# Altium PCB Prac FabLab.PcbDoc
Units mil, origin at the board's own origin, x right, y up, seen from the top; angles counter-clockwise.
Board outline 3565 x 2985 mil, 2 copper layers (Top Layer, Bottom Layer); 37 components, 41 nets, 155 pads, 10 vias.
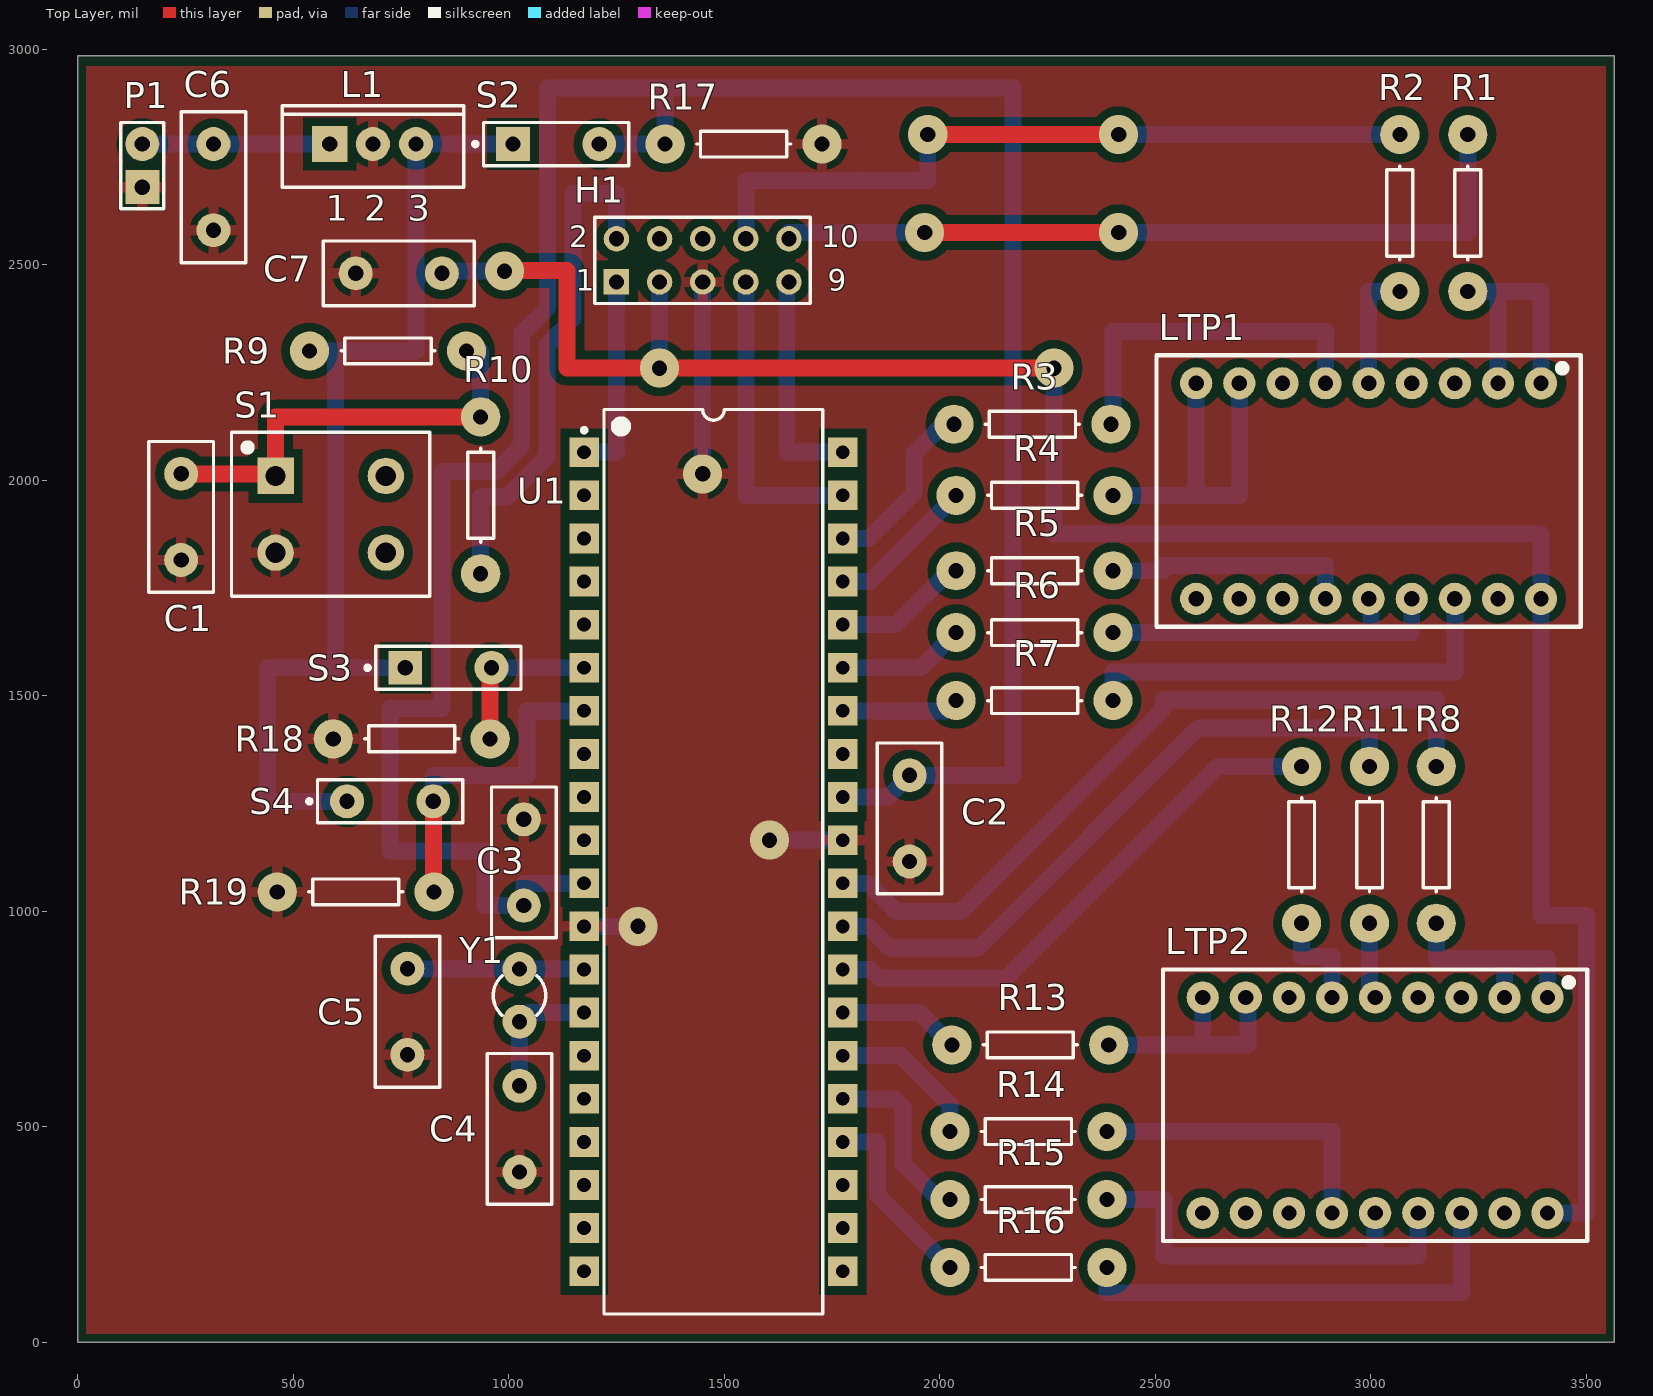
[diagram p0: Top Layer view]
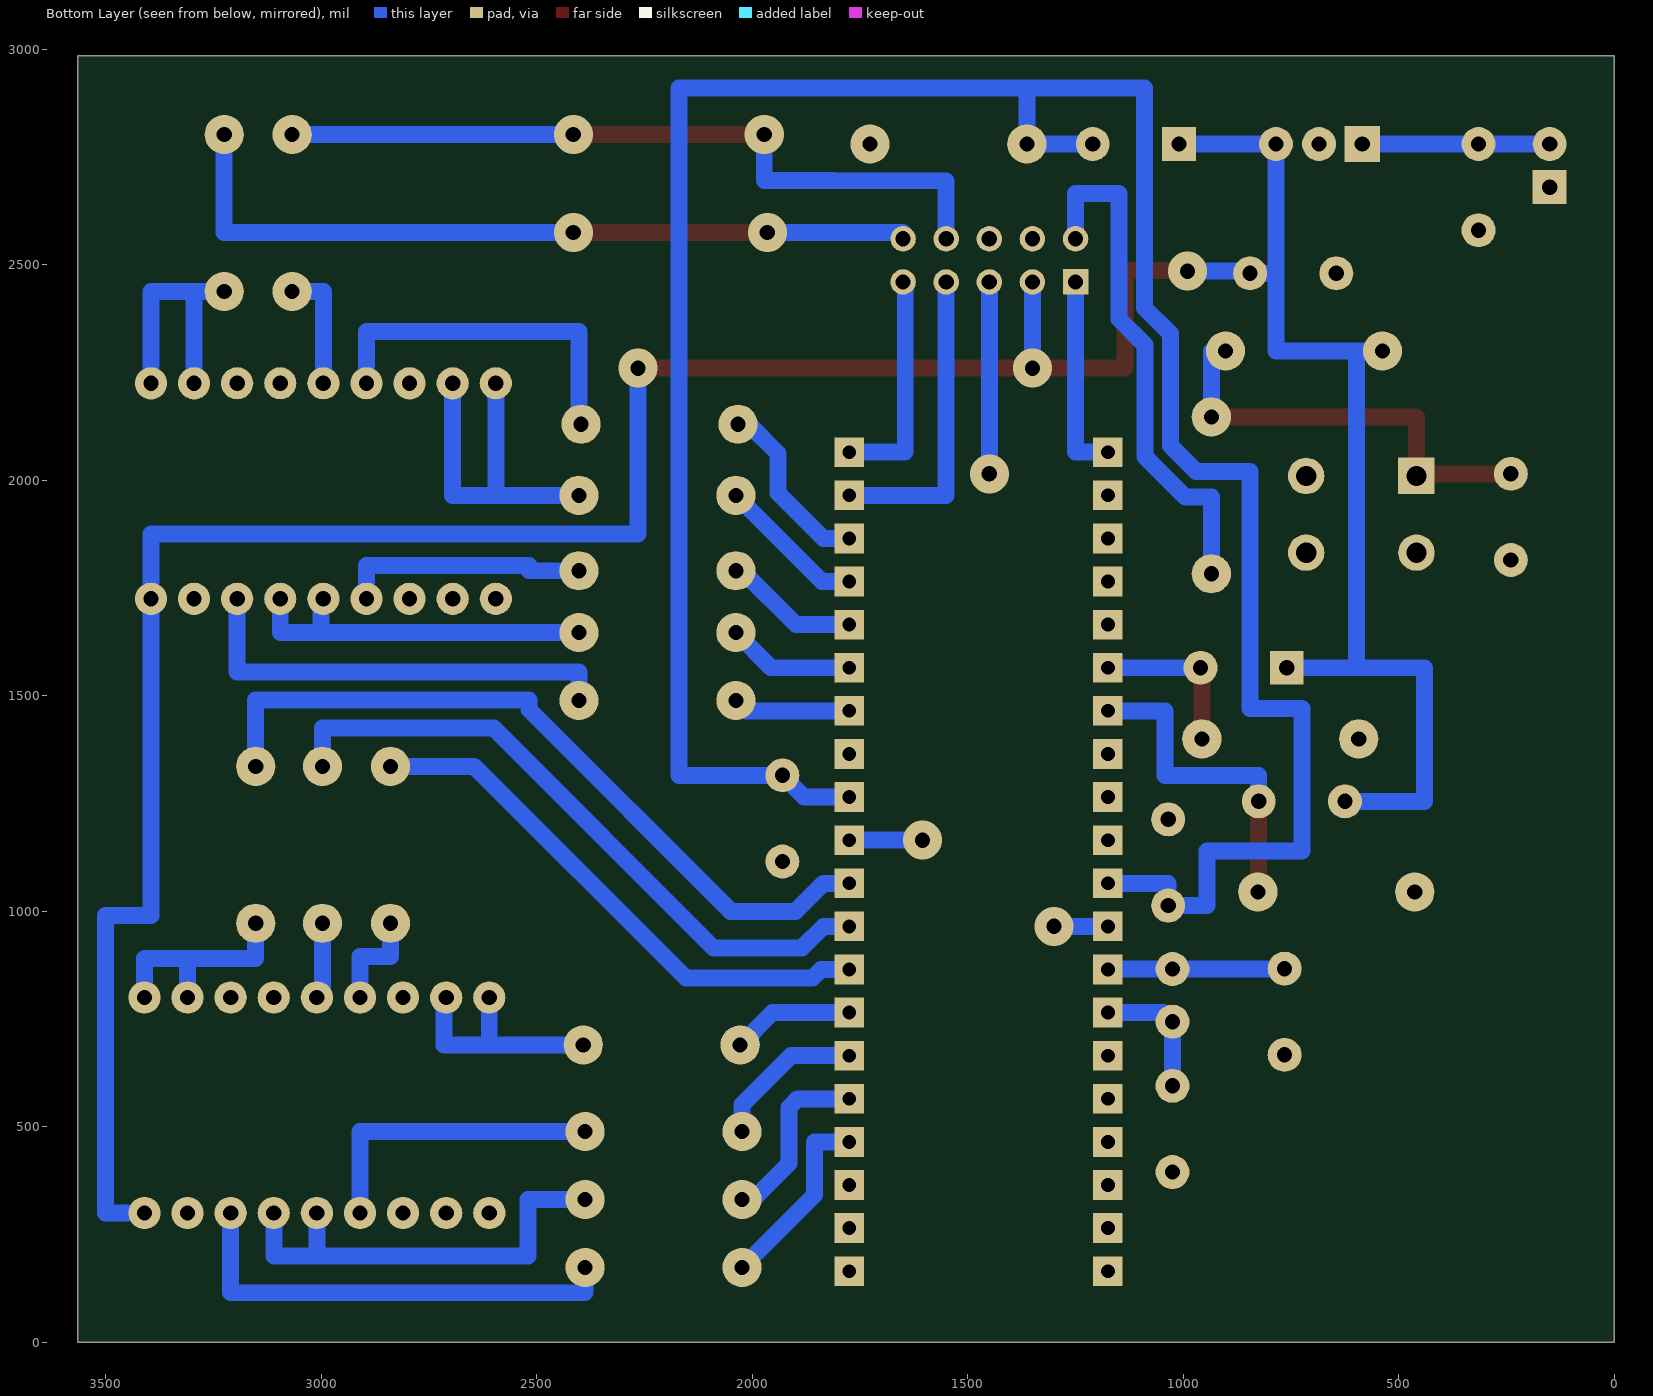
[diagram p1: Bottom Layer view, seen from below]

## Layer stack, top to bottom
Top Solder: solder mask 0.4, Solder Resist, Dk 3.5
Top Layer: signal copper 1.4
Dielectric 1: dielectric 12.6, FR-4, Dk 4.8
Bottom Layer: signal copper 1.4
Bottom Solder: solder mask 0.4, Solder Resist, Dk 3.5

## Board outline
0,0 0,2985 3565,2985 3565,0

## Design rules (kind name [scope] priority, off if disabled: settings)
AssemblyTestPointUsage [All] p1 off:
AssemblyTestpoint [All] p1 off: testpointundercomponent=TRUE minsize=40 maxsize=100 preferedsize=60 minholesize=0 maxholesize=40 preferedholesize=32 testpointgrid=1 usegrid=TRUE gridtolerance=0.01 allowsidetop=TRUE allowsidebottom=TRUE
BoardOutlineClearance [All] p1: gap=20 ignorepadtopadclearanceinfootprint=FALSE except(10: Track-CutoutEdge THPad-CutoutEdge)
Clearance [All] p1: gap=20 ignorepadtopadclearanceinfootprint=TRUE
FabricationTestPointUsage [All] p1 off: valid=0 allowmultiple=FALSE
FabricationTestpoint [All] p1 off: side=3 testpointundercomponent=TRUE minsize=40 maxsize=100 preferedsize=60 minholesize=0 maxholesize=40 preferedholesize=32 testpointgrid=1 allowsidetop=TRUE allowsidebottom=TRUE usegrid=TRUE gridtolerance=0.01
HoleSize [All] p1: absolutevalues=TRUE maxlimit=1380 minlimit=32 maxpercent=80.000 minpercent=20.000
PolygonConnect [All] p1: connectstyle=Relief reliefconductorwidth=25 reliefentries=4 polygonreliefangle="90 Angle" airgapwidth=15
RoutingTopology RoutingTopology_1 [All] p1: topology=Shortest
RoutingTopology [InNet('3.3V')] p2: topology=Starburst
RoutingVias [All] p1: holewidth=35.43 width=90.55 viastyle="Through Hole" minholewidth=35.43 minwidth=90.55 maxholewidth=35.43 maxwidth=90.55
SolderMaskExpansion [All] p1: expansion=4
UnConnectedPin [Not InComponent('U3')] p1:
UnRoutedNet [All] p1: checkbadconnections=TRUE
Width [All] p1: maxlimit=39.37 minlimit=39.37 preferedwidth=39.37
23 further rules are at their usual default settings.

## Components (designator, comment, footprint, x,y, rotation, side; value= is the part's Value field where it differs from the comment)
C1 "CAP_100nF" RADIAL_0.2 240,1915 r270 top value=100nF
C2 "CAP_100nF" RADIAL_0.2 1930,1215.4 r270 top value=100nF
C3 "CAP_100nF" RADIAL_0.2 1035,1113.28 r90 top value=100nF
C4 "Capacitor" RADIAL_0.2 1025,495 r90 top value=20pF
C5 "Capacitor" RADIAL_0.2 765,766.97 r90 top value=20pF
C6 "CAP_3.3µF" AXIAL_0.2 315,2680 r90 top value=3.3µF
C7 "CAP_100nF" AXIAL_0.2 745,2480 r0 top value=100nF
H1 "Header 5X2" HDR2X5 1250,2460 r0 top
L1 "L78L05ACZTR" TO-220-AB 685,2780 r0 top
LTP1 "LTP-587HR" LTP-587HR_DIP18 2502.87,2289.96 r270 top
LTP2 "LTP-587HR" LTP-587HR_DIP18 2518,865 r270 top
P1 "Header 2" HDR1X2 150,2680 r90 top
R1 "Res_1K" AXIAL-0.3 3225,2620 r270 top value=1KO
R2 "Res_1K" AXIAL-0.3 3067.31,2620 r270 top value=1KO
R3 "Res_1K" AXIAL-0.3 2215,2130 r0 top value=1KO
R4 "Res_1K" AXIAL-0.3 2220,1965 r0 top value=1KO
R5 "Res_1K" AXIAL-0.3 2220,1790 r0 top value=1KO
R6 "Res_1K" AXIAL-0.3 2220,1646.54 r0 top value=1KO
R7 "Res_1K" AXIAL-0.3 2220,1488.85 r0 top value=1KO
R8 "Res_1K" AXIAL-0.3 3151.95,1154.27 r270 top value=1KO
R9 "Res_10K" AXIAL-0.3 720,2300 r180 top value=10KO
R10 "Res_1K" AXIAL-0.3 935,1965 r270 top value=1KO
R11 "Res_1K" AXIAL-0.3 2997.12,1154.27 r270 top value=1KO
R12 "Res_1K" AXIAL-0.3 2839.43,1154.27 r270 top value=1KO
R13 "Res_1K" AXIAL-0.3 2210,690 r0 top value=1KO
R14 "Res_1K" AXIAL-0.3 2205.73,489.04 r0 top value=1KO
R15 "Res_1K" AXIAL-0.3 2205.73,331.35 r0 top value=1KO
R16 "Res_1K" AXIAL-0.3 2205.73,173.66 r0 top value=1KO
R17 "Res_10K" AXIAL-0.3 1545,2780 r0 top value=10KO
R18 "Res_10K" AXIAL-0.3 775,1400 r180 top value=10KO
R19 "Res_10K" AXIAL-0.3 645,1045 r180 top value=10KO
S1 "" SW-SPST-1 587,1921 r0 top
S2 "SW-SPST" SPST-2#1 1110,2780 r0 top
S3 "SW-SPST" SPST-2#1 860,1565 r0 top
S4 "SW-SPST" SPST-2#2 725,1255 r0 top
U1 "PIC18F45K22-I/P" MCHP-PDIP-P40 1475,1115 r0 top
Y1 "XTAL" R38 1025,805 r0 top

## Footprints (in the part's own frame and the unit in brackets; to place one, negate y for a bottom-side part, rotate by r counter-clockwise, add the part's x,y. Pads: shape width x height; smd on the part's side, far side on the other; paste and mask are expansions set on the pad)
AXIAL-0.3 [mil] "Axial Device, Thru-Hole; 2 Leads; 0.3 in Pin Spacing"
  round 91 hole 35: 1(-182,0) 2(182,0)
  silkscreen extent -109,-30 109,30
AXIAL_0.2 [mm] "Resistor-style footprint for Radial Cap, Thru-Hole; 2 Leads; 0.2 in Pin Spacing"
  round 2 hole 0.9: 1(-2.54,0) 2(2.54,0)
  silkscreen extent -4.44,-1.91 4.44,1.91
HDR1X2 [mm] "Connector; Header; 2 Position"
  rect 2x2 hole 0.9: 1(0,0)
  round 2 hole 0.9: 2(2.54,0)
  silkscreen extent -1.27,-1.27 3.81,1.27
HDR2X5 [mm] "Connector; Header; 5x2 Position"
  rect 1.5x1.5 hole 0.9: 1(0,0)
  round 1.5 hole 0.9: 2(0,2.54) 3(2.54,0) 4(2.54,2.54) 5(5.08,0) 6(5.08,2.54) 7(7.62,0) 8(7.62,2.54) 9(10.16,0) 10(10.16,2.54)
  silkscreen extent -1.27,-1.27 11.43,3.81
LTP-587HR_DIP18 [mil] "DIP; 18 Leads; Row Spacing 7.62 mm; Pitch 2.54 mm"
  round 74.8 hole 35.43: 1(65,892.13) 2(65,792) 3(64.96,692.13) 4(64.96,592.13) 5(64.96,492.13) 6(64.96,392) 7(65,292.13) 8(65,192) 9(64.96,92.13) 10(564.96,92) 11(564.96,192) 12(564.96,292.13) 13(564.96,392.13) 14(564.96,492.13) 15(565,592.13) 16(564.96,692.13) 17(564.96,792.13) 18(565,892)
  silkscreen extent 0,0 630,984
MCHP-PDIP-P40 [mil] "PDIP, 40-Leads, Body 51.75x13.53mm, Pitch 2.54mm"
  rect 69x69 hole 32: 1(-300,950) 2(-300,850) 3(-300,750) 4(-300,650) 5(-300,550) 6(-300,450) 7(-300,350) 8(-300,250) 9(-300,150) 10(-300,50) 11(-300,-50) 12(-300,-150) 13(-300,-250) 14(-300,-350) 15(-300,-450) 16(-300,-550) 17(-300,-650) 18(-300,-750) 19(-300,-850) 20(-300,-950) 21(300,-950) 22(300,-850) 23(300,-750) 24(300,-650) 25(300,-550) 26(300,-450) 27(300,-350) 28(300,-250) 29(300,-150) 30(300,-50) 31(300,50) 32(300,150) 33(300,250) 34(300,350) 35(300,450) 36(300,550) 37(300,650) 38(300,750) 39(300,850) 40(300,950)
  silkscreen extent -305,-1049 254,1049, body extent -305,-1047 305,1047, height 250
R38 [mm] "Crystal, Thru-Hole; 2 Leads; Body 3.1 x 8.2 mm (Dia.xH)"
  round 2 hole 0.9: 1(0,1.55) 2(0,-1.55)
  silkscreen extent -1.55,-1.19 1.55,1.17
RADIAL_0.2 [mm] "Radial Cap, Thru-Hole; 2 Leads; 0.2 in Pin Spacing"
  round 2 hole 0.9: 1(-2.54,0) 2(2.54,0)
  silkscreen extent -4.44,-1.91 4.44,1.91
SPST-2#1 [mm] "Switch; 2 Leads"
  rect 2x2 hole 0.9: 1(-2.54,0)
  round 2 hole 0.9: 2(2.54,0)
  silkscreen extent -4.89,-1.27 4.28,1.27
SPST-2#2 [mm] "Switch; 2 Leads"
  round 2 hole 0.9: 1(-2.54,0) 2(2.54,0)
  silkscreen extent -4.89,-1.27 4.28,1.27
SW-SPST-1 [mil] "DIP. 4 Leads, Row spacing 6.50mm, Pitch 4.50mm"
  rect 84.65x84.65 hole 47: 1(-128,89)
  round 84.65 hole 47: 2(128,89) 3(-128,-89) 4(128,-89)
  silkscreen extent -230,-190 230,190
TO-220-AB [mm] "TO, Thru-Hole, Vertical, Heatsink Mounted; 3 In-Line Leads; Pitch 2.54 mm"
  rect 2.1x2.1 hole 0.9: 1(-2.54,0)
  round 2 hole 0.9: 2(0,0) 3(2.54,0)
  silkscreen extent -5.35,-2.55 5.35,2.25

## Part data
C1 C2 C3 C7: "Capacitor", Supplier Part Number 1=478-3188-ND, LatestRevisionDate=17-Jul-2002, LatestRevisionNote="Re-released for DXP Platform.", PackageDescription="Radial Cap, Thru-Hole; 2 Leads; 0.3 in Pin Spacing", PackageReference=RAD-0.3, Published=8-Jun-2000, Publisher="Altium Limited", Supplier 1=Digi-Key
C6: "Capacitor", Supplier Part Number 1=445-173440-1-ND, LatestRevisionDate=17-Jul-2002, LatestRevisionNote="Re-released for DXP Platform.", PackageDescription="Radial Cap, Thru-Hole; 2 Leads; 0.3 in Pin Spacing", PackageReference=RAD-0.3, Published=8-Jun-2000, Publisher="Altium Limited", Supplier 1=Digi-Key
H1: "Header, 5-Pin, Dual row", LatestRevisionDate=17-Jul-2002, LatestRevisionNote="Re-released for DXP Platform.", Publisher="Altium Limited"
LTP1 LTP2: "Character LED Display Module Red 16-Segment, Alphanumeric 1 Character Common Anode 2V 20mA 0.984\" H x 0.630\" W x 0.374\" D (25.00mm x 16.00mm x 9.50mm) 18-DIP (0.500\", 12.70mm)"
P1: "Header, 2-Pin", LatestRevisionDate=17-Jul-2002, LatestRevisionNote="Re-released for DXP Platform.", Publisher="Altium Limited"
R1 R2 R3 R4 R5 R6 R7 R8 R10 R11 R12 R13 R14 R15 R16: "1 kOhms ±1% 0.25W, 1/4W Through Hole Resistor Axial Flame Retardant Coating, Safety Metal Film", Supplier Part Number 1=RNF14FTD1K00CT-ND, LatestRevisionDate=17-Jul-2002, LatestRevisionNote="Re-released for DXP Platform.", PackageDescription="Axial Device, Thru-Hole; 2 Leads; 0.3 in Pin Spacing", PackageReference=AXIAL-0.3, Published=8-Jun-2000, Publisher="Altium Limited", Supplier 1=Digi-Key
R9: "10 kOhms ±1% 0.25W, 1/4W Through Hole Resistor Axial Flame Retardant Coating, Safety Metal Film", Supplier Part Number 1=RNF14FTD10K0CT-ND, LatestRevisionDate=17-Jul-2002, LatestRevisionNote="Re-released for DXP Platform.", PackageDescription="Axial Device, Thru-Hole; 2 Leads; 0.3 in Pin Spacing", PackageReference=AXIAL-0.3, Published=8-Jun-2000, Publisher="Altium Limited", Supplier 1=Digi-Key
R17 R18 R19: library part Res_1K, "1 kOhms ±1% 0.25W, 1/4W Through Hole Resistor Axial Flame Retardant Coating, Safety Metal Film", Supplier Part Number 1=RNF14FTD1K00CT-ND, LatestRevisionDate=17-Jul-2002, LatestRevisionNote="Re-released for DXP Platform.", PackageDescription="Axial Device, Thru-Hole; 2 Leads; 0.3 in Pin Spacing", PackageReference=AXIAL-0.3, Published=8-Jun-2000, Publisher="Altium Limited", Supplier 1=Digi-Key
S1: library part SW-SPST_B3F-1000, "Tactile Switch SPST-NO Top Actuated Through Hole", Supplier Part Number 1=SW400-ND, LatestRevisionDate=17-Jul-2002, LatestRevisionNote="Re-released for DXP Platform.", PackageDescription="Switch; 2 Leads", PackageReference=SPST-2, Published=24-Mar-1999, Publisher="Altium Limited", Supplier 1=Digi-Key
S2 S3 S4: "Single-Pole, Single-Throw Switch", LatestRevisionDate=17-Jul-2002, LatestRevisionNote="Re-released for DXP Platform.", PackageDescription="Switch; 2 Leads", PackageReference=SPST-2, Published=24-Mar-1999, Publisher="Altium Limited"
U1: "Low-Power, High-Performance Microcontroller with XLP Technology, 64 MHz, 35 I/O, -40 to 85 degC, 40-pin PDIP (P40), Tube", Manufacturer=Microchip, Operation Voltage Range="2.3V - 5.5V", Supplier Part Number 1=PIC18F45K22-I/P-ND, # of A/D Channels=28, ComponentLink1Description=Datasheet, ComponentLink1URL=http://ww1.microchip.com/downloads/en/DeviceDoc/41412F.pdf, ComponentLink2Description="Package Specification", ComponentLink2URL=http://www.microchip.com/stellent/groups/techpub_sg/documents/packagingspec/en012702.pdf, ComponentLink3Description="URL Link1", ComponentLink3URL="Product URL:http://www.microchip.com/datasheet/PIC18F45K22", DatasheetVersion="Rev. F", Digital Communication="2 -A/E/USART, 2 -MSSP(SPI/I2C)", EEPROM Data Memory (bytes)=256, I/O Pins=35, Internal Oscillator="16 MHz, 31 kHz", Max. CPU Speed MHz=64, Memory Type=Flash, Mounting Technology="Through Hole", PackageDescription="40-Lead Plastic Dual In-Line Package, Body 51.75 x 13.53 mm, Pitch 2.54 mm", PackageReference=PDIP-P40, PackageVersion="C04-016B, 04/2013", Packing=TUBE, PartNumber=PIC18F45K22-I/P, Program Memory KBytes=32, Program Memory KWords=16, RAM=1536, RoHS=TRUE, Supplier 1=Digi-Key, Timers="3 - 8-bit, 4 - 16-bit"
Y1: "Crystal Oscillator", LatestRevisionDate=17-Jul-2002, LatestRevisionNote="Re-released for DXP Platform.", PackageDescription="Crystal, Thru-Hole; 2 Leads; Body 3.1 x 8.2 mm (Dia.xH)", PackageReference=R38, Published=8-Jun-2000, Publisher="Altium Limited"
C4 C5: LatestRevisionDate=17-Jul-2002, LatestRevisionNote="Re-released for DXP Platform.", PackageDescription="Radial Cap, Thru-Hole; 2 Leads; 0.3 in Pin Spacing", PackageReference=RAD-0.3, Published=8-Jun-2000, Publisher="Altium Limited"

## Via types
v1: diameter 90.55, hole 35.43, Top Layer to Bottom Layer, 10 vias

## Nets (pads, with @x,y where several pads share a name; then routed paths per layer and width w, separated by ;. In a path a pad name is that pad's centre, name@x,y a point inside that pad or via, vN(x,y) a via of type N, cw(c..) or ccw(c..) an arc to the next point about the centre after c; other vN are vias at no path point)
3.3V: C7.2 H1.3 L1.3 LTP1.18 LTP2.18 R9.2 S2.1 S3.1 S4.1 | length 7696.1
  Top Layer w39.37: v1(990,2485) 990,2486.88 1135,2486.88 1135,2260 v1(1350,2260) v1(2265,2260)
  Bottom Layer w39.37: R9.2 598,2300 598,2299.62 ; 598,1570 598,2299.62 ; S4.1 440,1255 440,1565 S3.1 ; v1(990,2485) 845,2485 C7.2 785,2480 ; S2.1 L1.3 785,2480 ; v1(1350,2260) H1.3 ; v1(2265,2260) 2265,1875.18 2487.19,1875.18 2487.19,1875 3394.87,1875 LTP1.18 3394.87,990 3500,990 3500,300 LTP2.18 ; 598,2299.62 785,2299.62 785,2480
Display_1BA: LTP1.1 LTP1.2 R1.2 | length 596.1
  Bottom Layer w39.37: R1.2 3294.87,2438 ; LTP1.2 3294.87,2438 ; LTP1.1 3395,2438 3294.87,2438
Display_1C: LTP1.16 R7.2 | length 1029.2
  Bottom Layer w39.37: R7.2 2402,1555 3195,1555 LTP1.16
Display_1D: LTP1.13 R5.2 | length 582.2
  Bottom Layer w39.37: R5.2 2517.78,1790 2517.78,1802.09 2895,1802.09 LTP1.13
Display_1FE: LTP1.8 LTP1.9 R4.2 | length 812.8
  Bottom Layer w39.37: R4.2 2595,1965 ; LTP1.9 2595,1965 ; LTP1.8 2694.87,1965 2595,1965
Display_1G: LTP1.6 R3.2 | length 797.9
  Bottom Layer w39.37: R3.2@2402,2160 2402,2345 2894.87,2345 LTP1.6
Display_1H: LTP1.5 R2.2 | length 285.3
  Bottom Layer w39.37: LTP1.5 2995,2438 R2.2
Display_1UP: LTP1.14 LTP1.15 R6.2 | length 854.9
  Bottom Layer w39.37: R6.2 3000,1646.54 ; LTP1.14 3000,1725 3000,1646.54 ; LTP1.15 3095,1646.54 3000,1646.54
Display_2BA: LTP2.1 LTP2.2 R8.2 | length 520.4
  Bottom Layer w39.37: R8.2 3151.95,890 3310,890 ; LTP2.2 3310,890 ; LTP2.1 3410.13,890 3310,890
Display_2C: LTP2.16 R16.2 | length 1066.1
  Bottom Layer w39.37: R16.2 2387.73,115 3210.13,115 LTP2.16
Display_2D: LTP2.13 R14.2 | length 711.4
  Bottom Layer w39.37: R14.2 2910.13,489.04 LTP2.13
Display_2FE: LTP2.8 LTP2.9 R13.2 | length 548
  Bottom Layer w39.37: R13.2 2610.13,690 ; LTP2.9 2610.13,690 ; LTP2.8 2715,800 2715,690 2610.13,690
Display_2G: LTP2.6 R12.2 | length 242.8
  Bottom Layer w39.37: R12.2 2839.43,895 2910,895 LTP2.6
Display_2H: LTP2.5 R11.2 | length 185.2
  Bottom Layer w39.37: R11.2 2997.12,800.04 LTP2.5
Display_2UP: LTP2.14 LTP2.15 R15.2 | length 1053.8
  Bottom Layer w39.37: R15.2 2520,331.35 2520,200 3010.13,200 ; LTP2.14 3010.13,200 ; LTP2.15 3110,300 3110,200 3010.13,200
GND: C1.2 C2.2 C3.2 C4.1 C5.1 C6.1 C7.1 H1.5 L1.2 P1.1 R17.2 R18.2 R19.2 S1.3 U1.12 U1.31 | length 740
  Bottom Layer w39.37: U1.12 v1(1300,965) ; v1(1450,2015) H1.5 ; v1(1605,1165) U1.31
M\C\L\R\: H1.1 U1.1 | length 470
  Bottom Layer w39.37: U1.1 1250,2065 H1.1
NetC1_1: C1.1 R9.1 R10.1 S1.1 | length 1013
  Top Layer w39.37: C1.1 459,2015 459,2147 R10.1
  Bottom Layer w39.37: R9.1 935,2300 R10.1
NetC2_1: C2.1 C3.1 R17.1 S2.2 U1.11 U1.32 | length 6071.5
  Bottom Layer w39.37: U1.11@1171.55,1061.55 U1.11 1035,1065 C3.1 945,1013.28 945,1140 725,1140 725,1470 845,1470 845,2020 970,2020 1030,2080 1030,2340 1090,2400 1090,2910 1363,2910 ; S2.2 R17.1 1363,2910 ; U1.32 1879.6,1265 C2.1 2170,1315.4 2170,2910 1363,2910
NetC6_2: C6.2 L1.1 P1.2 | length 435
  Bottom Layer w39.37: P1.2 C6.2 L1.1
NetH1_2: H1.2 R10.2 | length 1211.3
  Bottom Layer w39.37: R10.2 935,1960.63 994.59,1960.63 1089.37,2055.41 1089.37,2314.37 1149.37,2374.37 1149.37,2665 1250,2665 H1.2
NetH1_8: H1.10 R1.1 | length 1817
  Top Layer w39.37: v1(1965,2575) v1(2415,2575)
  Bottom Layer w39.37: H1.10 1650,2575 v1(1965,2575) ; v1(2415,2575) 3225,2575 R1.1
NetH1_10: H1.8 R2.1 | length 1759.3
  Top Layer w39.37: v1(1972.18,2802) v1(2415,2802)
  Bottom Layer w39.37: H1.8 1550,2694.81 1812.18,2694.81 1812.18,2695 1972.18,2695 v1(1972.18,2802) ; v1(2415,2802) R2.1
RA4: R18.1 S3.2 U1.6 | length 383
  Top Layer w39.37: R18.1 957,1565 S3.2
  Bottom Layer w39.37: S3.2 U1.6
RA5: R19.1 S4.2 U1.7 | length 772.8
  Top Layer w39.37: S4.2 825,1047 R19.1
  Bottom Layer w39.37: R19.1@825,1045 R19.1 ; S4.2 825,1314.82 1042.18,1314.82 1042.18,1465 U1.7
RA6: C4.2 U1.14 Y1.2 | length 307.7
  Bottom Layer w39.37: C4.2 Y1.2 1046.02,765 U1.14
RA7: C5.2 U1.13 Y1.1 | length 411.4
  Bottom Layer w39.37: C5.2 765.94,866.02 Y1.1 1175,866.02 U1.13
RB1: R7.1 U1.34 | length 272.9
  Bottom Layer w39.37: U1.34 2014.15,1465 R7.1
RB2: R6.1 U1.35 | length 296.8
  Bottom Layer w39.37: U1.35 1956.46,1565 R6.1
RB3: R5.1 U1.36 | length 314.8
  Bottom Layer w39.37: U1.36 1898.77,1665 2023.77,1790 R5.1
RB4: R4.1 U1.37 | length 345.8
  Bottom Layer w39.37: U1.37 1838,1765 R4.1
RB5: R3.1 U1.38 | length 421.7
  Bottom Layer w39.37: U1.38 1835,1865 1940,1970 1940,2062 2008,2130 R3.1
RB6: H1.7 U1.39 | length 720
  Bottom Layer w39.37: H1.7 1550,1965 U1.39
RB7: H1.9 U1.40 | length 529.9
  Bottom Layer w39.37: H1.9 1645.04,2460 1645.04,2065 U1.40
RC5: R16.1 U1.24 | length 441.2
  Bottom Layer w39.37: U1.24 1855,465 1855.63,464.37 1855.63,341.76 R16.1
RC6: R15.1 U1.25 | length 421.7
  Bottom Layer w39.37: U1.25 1895,565 1915,545 1915,415 1998.65,331.35 R15.1
RC7: R14.1 U1.26 | length 358.1
  Bottom Layer w39.37: U1.26 1910,665 2023.73,551.27 R14.1
RD4: R13.1 U1.27 | length 284.1
  Bottom Layer w39.37: U1.27 1953,765 R13.1
RD5: R12.1 U1.28 | length 1276.2
  Bottom Layer w39.37: U1.28 1840,865 1860,845 2153.73,845 2645,1336.27 R12.1
RD6: R11.1 U1.29 | length 1542.8
  Bottom Layer w39.37: U1.29 1835,965 1885,915 2089.87,915 2599.87,1425 2997.12,1425 R11.1
RD7: R8.1 U1.30 | length 1773.6
  Bottom Layer w39.37: U1.30 1835,1065 1900,1000 2050,1000 2517.78,1467.78 2517.78,1490 3151.95,1490 R8.1
pads on no net: H1.4 H1.6 LTP1.3 LTP1.4 LTP1.7 LTP1.10 LTP1.11 LTP1.12 LTP1.17 LTP2.3 LTP2.4 LTP2.7 LTP2.10 LTP2.11 LTP2.12 LTP2.17 S1.2 S1.4 U1.2 U1.3 U1.4 U1.5 U1.8 U1.9 U1.10 U1.15 U1.16 U1.17 U1.18 U1.19 U1.20 U1.21 U1.22 U1.23 U1.33

## Polygon pours and split planes (outlines as drawn)
GND on Top Layer "GND_L01_P003" (solid, remove dead copper, pour order 3): 20,2960 3550,2960 3550,0 20,0

## Text inside footprints (layer, text, board x,y; h text height)
H1: Top Overlay "10" at 1725,2540 h50; Top Overlay "9" at 1740,2440 h50; Top Overlay "1" at 1155,2440 h50; Top Overlay "2" at 1140,2540 h50
L1: Top Overlay "3" at 765.32,2601.85 h59.06; Top Overlay "2" at 665.32,2601.85 h59.06; Top Overlay "1" at 575.16,2601.85 h59.06